# Altium PCB SY_HR08_MCU_PCB_V1.1.PcbDoc (part 1 of 3)
Units mm, origin at the board's own origin, x right, y up, seen from the top; angles counter-clockwise.
Board outline 140 x 80 mm, 2 copper layers (Top Layer, Bottom Layer); 373 components, 215 nets, 1143 pads, 670 vias.
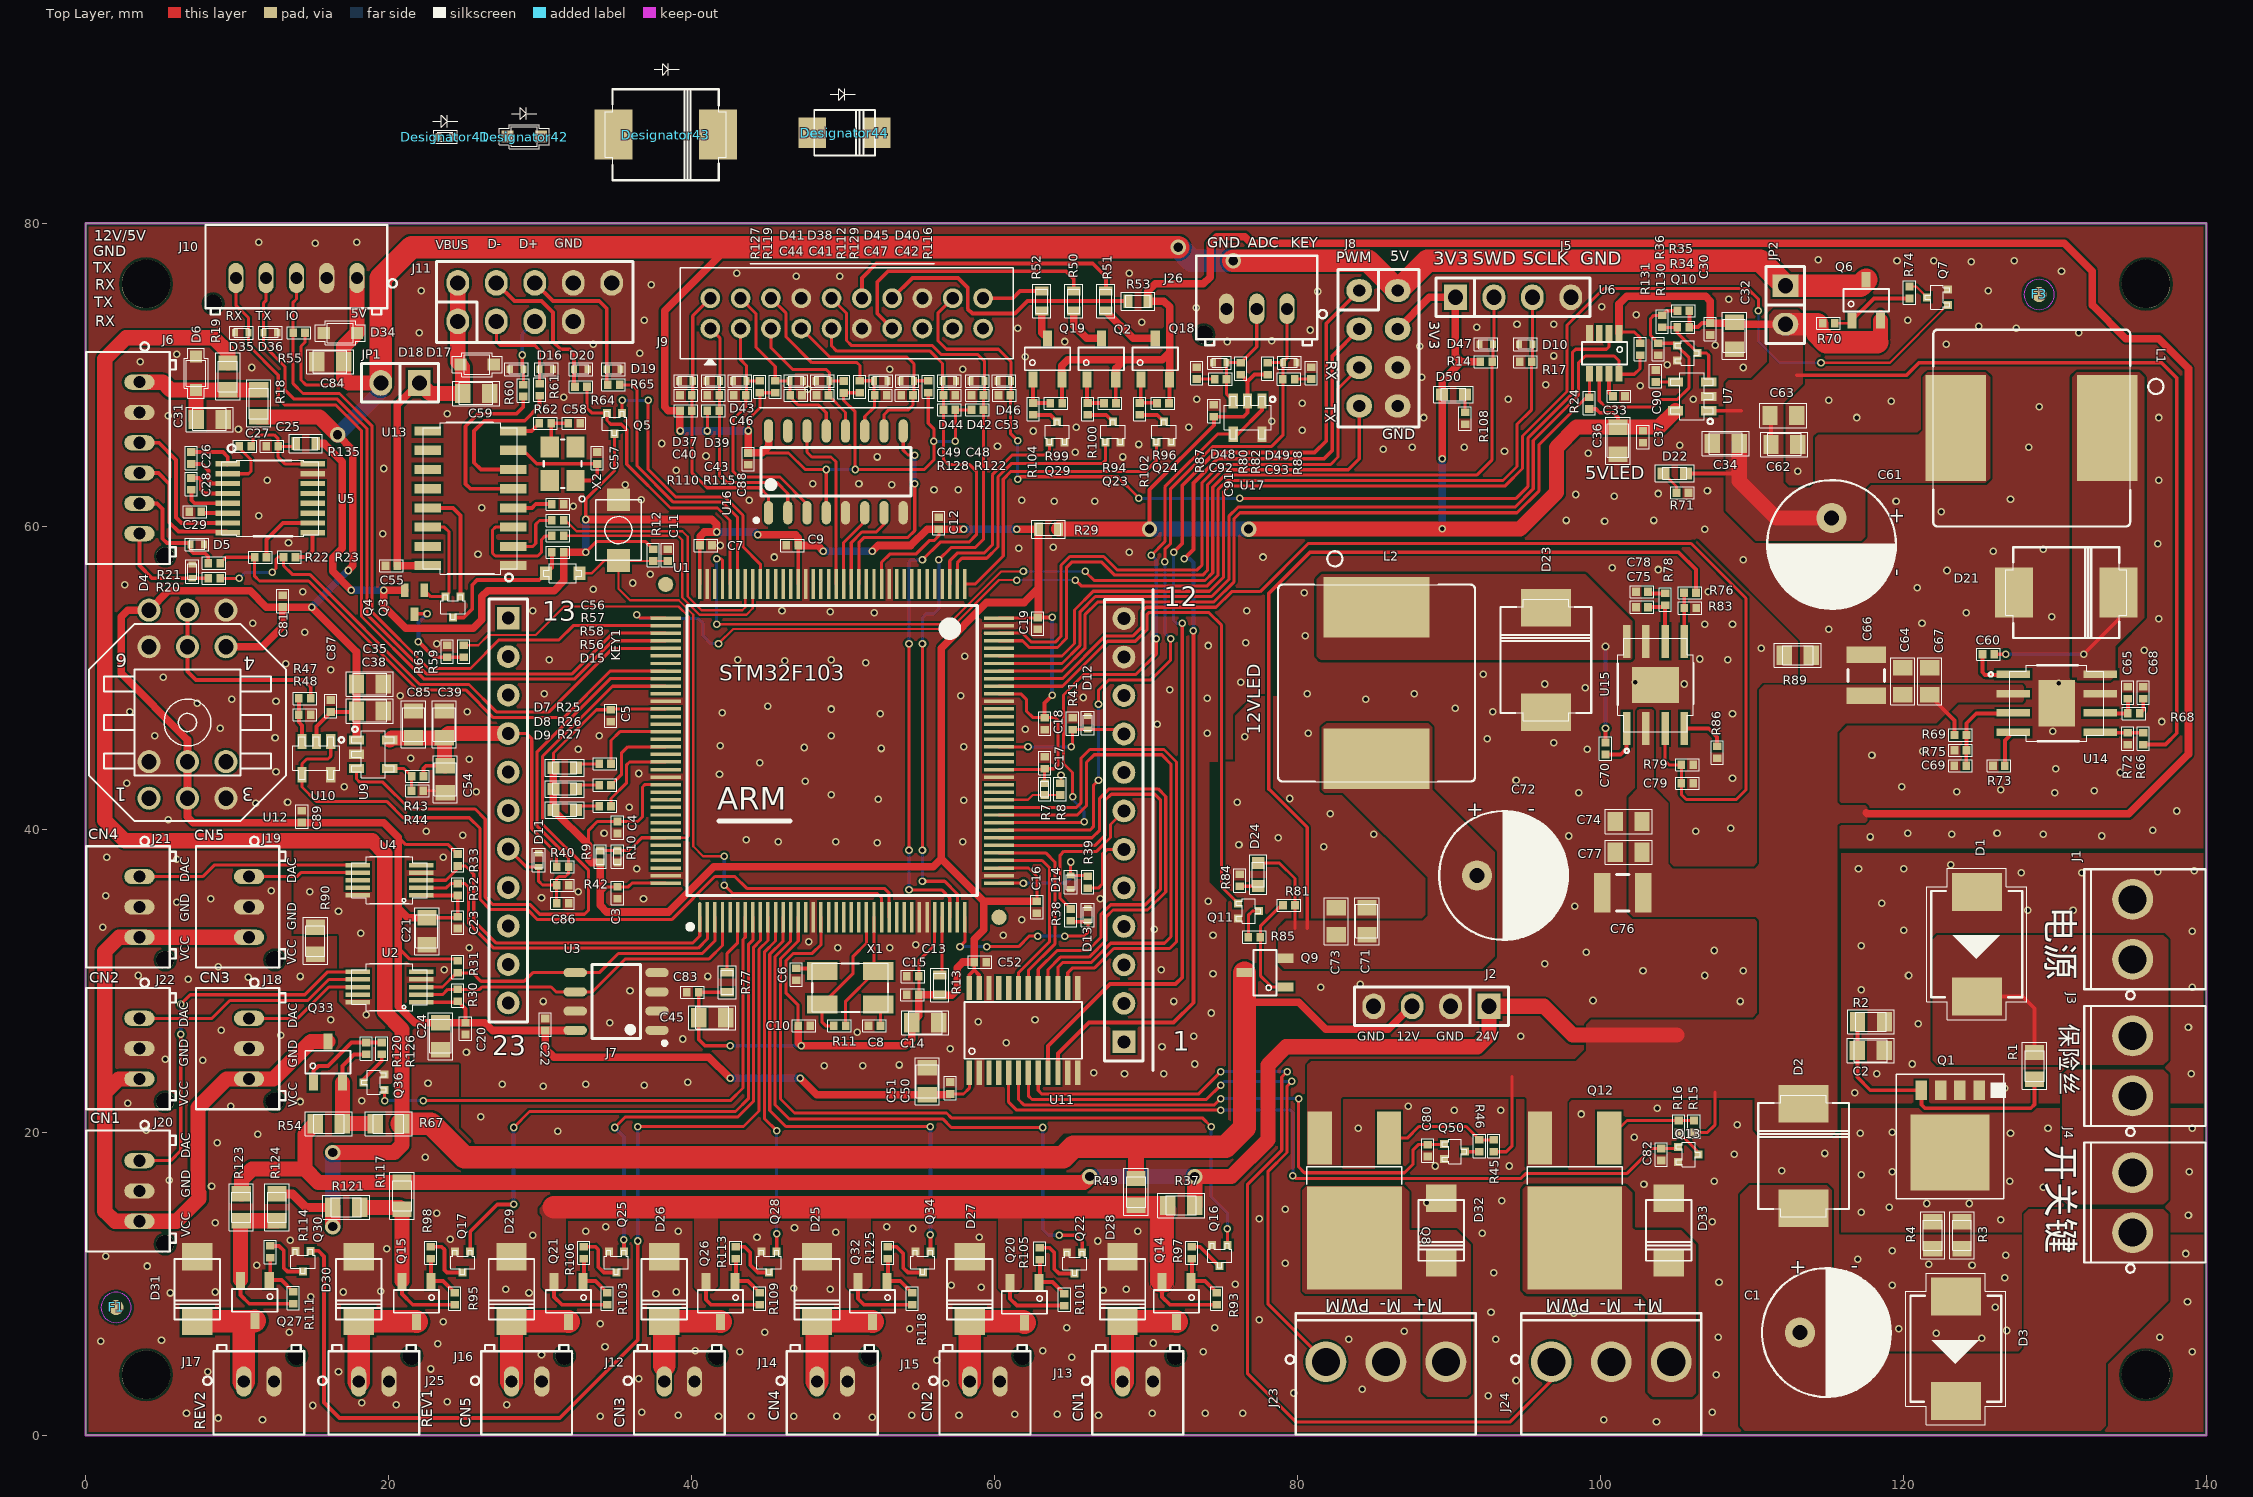
[diagram p0: Top Layer view]
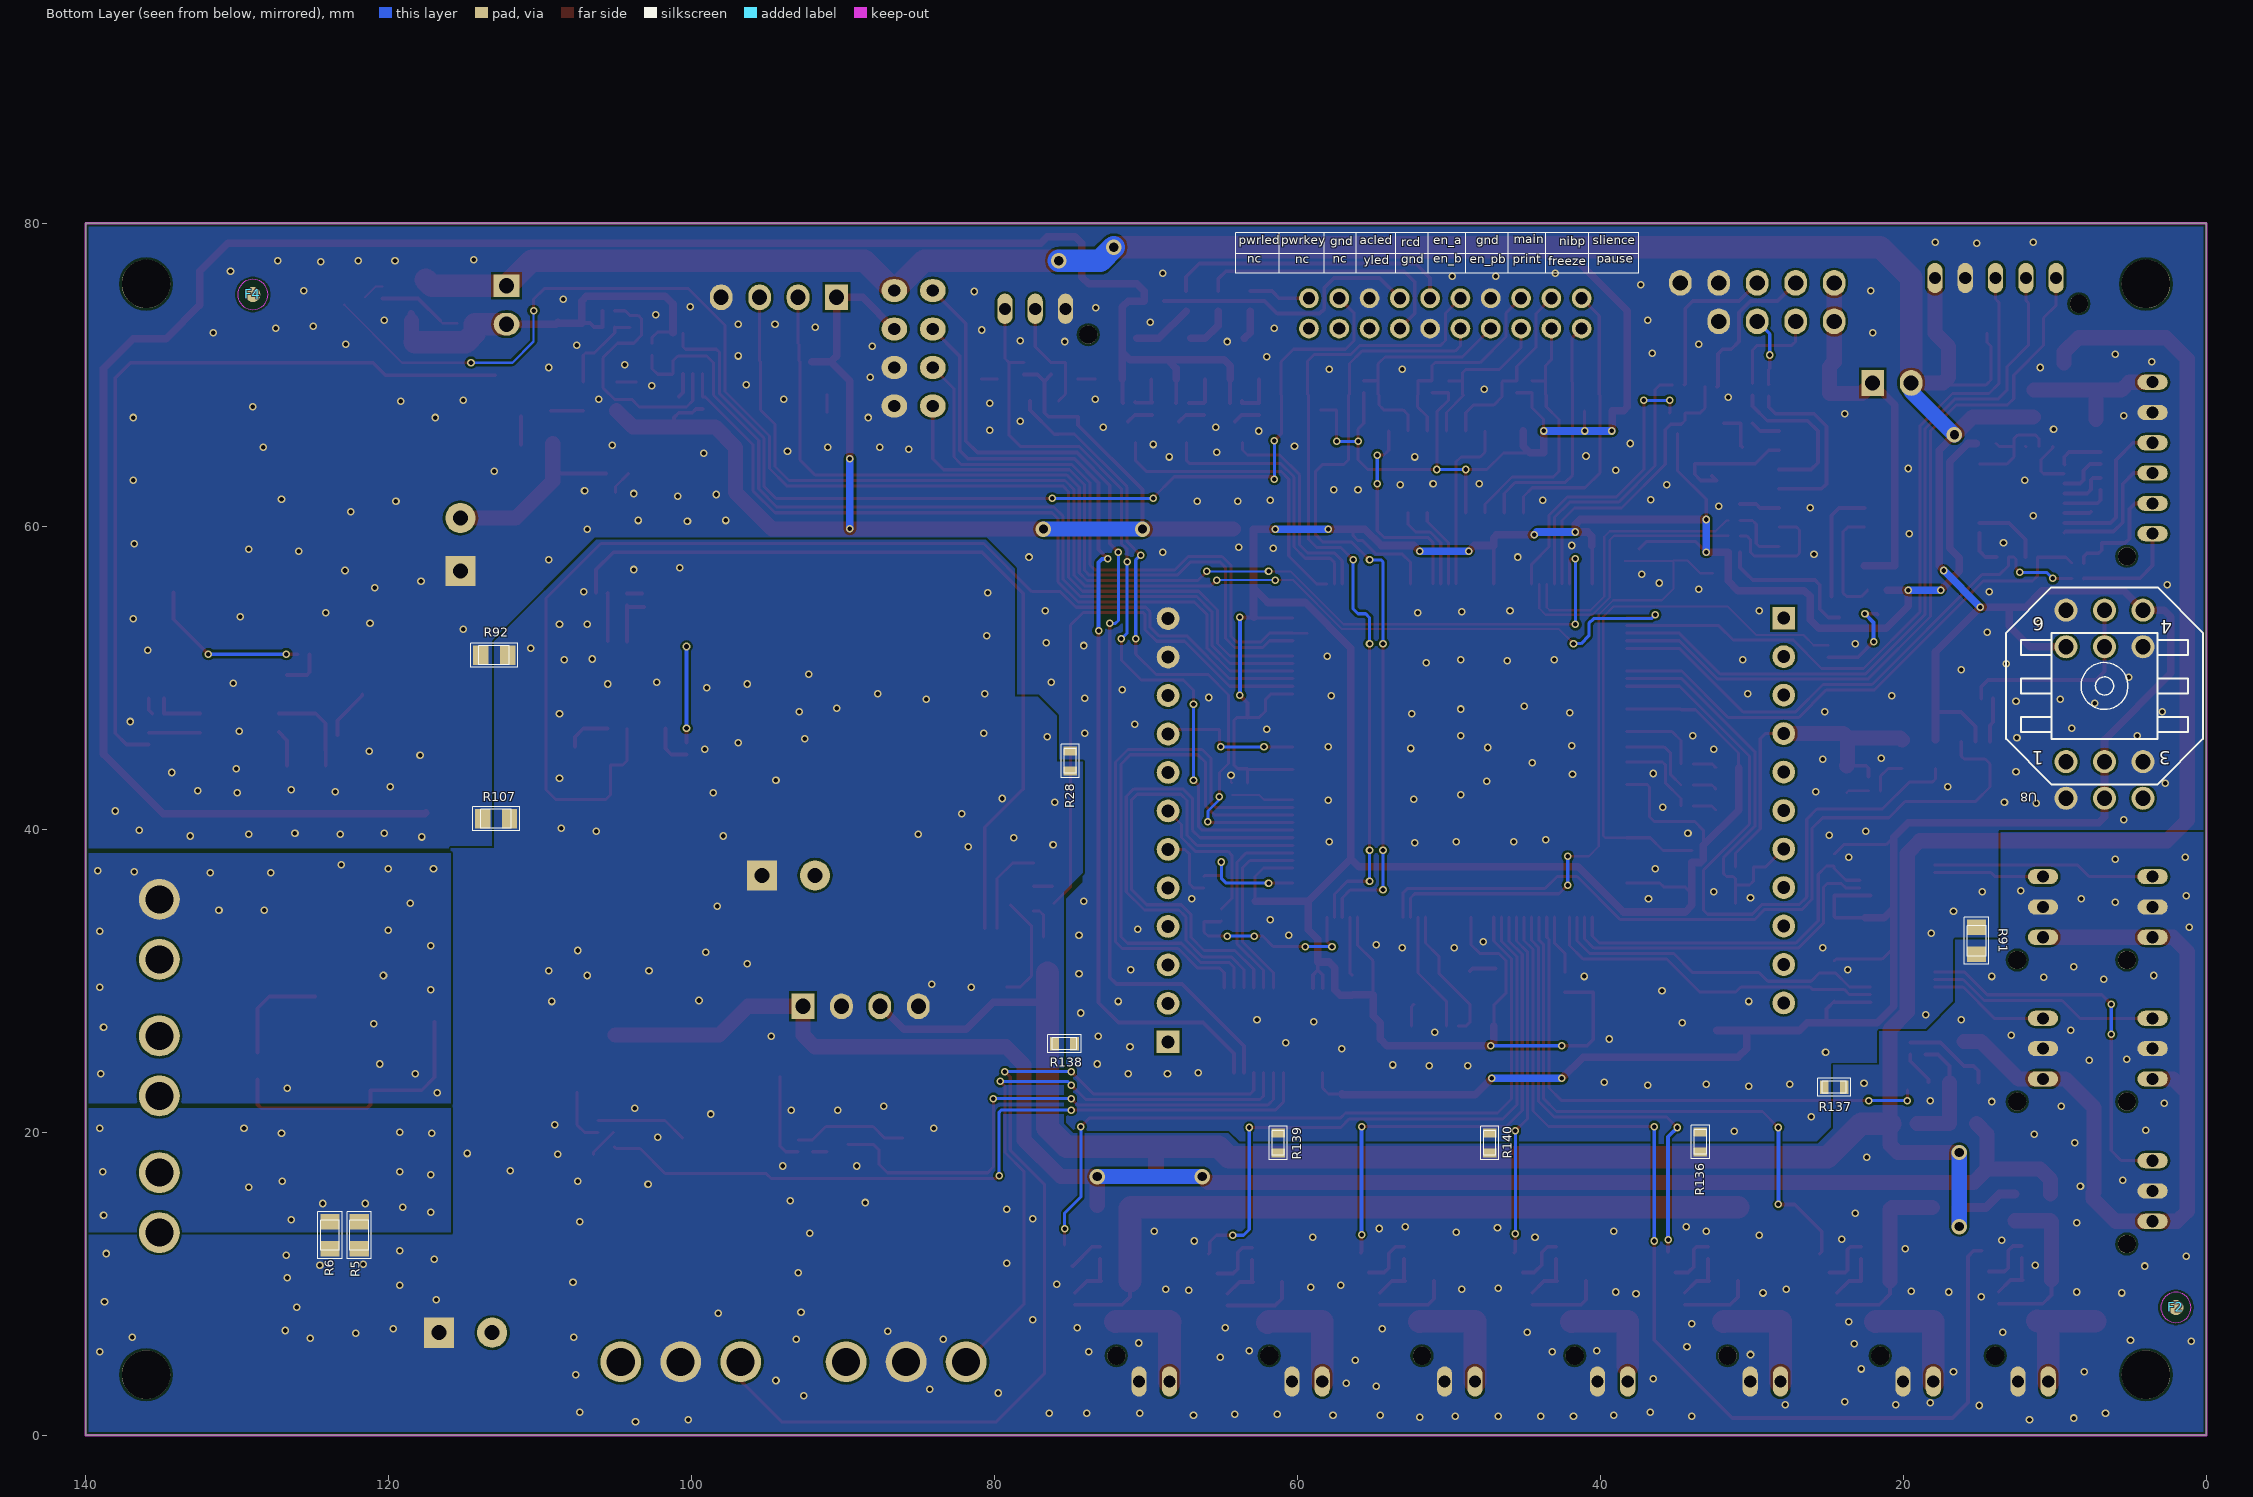
[diagram p1: Bottom Layer view, seen from below]

## Layer stack, top to bottom
Top Solder: solder mask 0.0102, Solder Resist, Dk 3.5
Top Layer: signal copper 0.0356
Dielectric 1: dielectric 0.32, FR-4, Dk 4.8
Bottom Layer: signal copper 0.0356
Bottom Solder: solder mask 0.0102, Solder Resist, Dk 3.5

## Board outline
0,0 140,0 140,80 0,80

## Design rules (kind name [scope] priority, off if disabled: settings)
Clearance [All] p1: gap=0.15
ComponentClearance [All] p1: gap=0.1 collisioncheckmode=3 verticalgap=0.1 showdistances=FALSE
DiffPairsRouting [All] p1: maxlimit=3 minlimit=0.15 mostfreqgap=0.15 toplayer_minwidth=0.15 toplayer_maxwidth=3 toplayer_prefwidth=0.15 bottomlayer_minwidth=0.15 bottomlayer_maxwidth=3 bottomlayer_prefwidth=0.15 maxuncoupledlength=12.7
HoleToHoleClearance [All] p1: gap=0.15 allowstackedmicrovias=TRUE
MinimumSolderMaskSliver [All] p1: minsoldermaskwidth=0.15
PlaneConnect [All] p1: planeconnectstyle=Direct reliefexpansion=0.508 reliefentries=4 reliefconductorwidth=0.254 reliefairgap=0.254
PolygonConnect [All] p1: connectstyle=Direct reliefconductorwidth=0.254 reliefentries=4 polygonreliefangle="90 Angle" airgapwidth=0.254
RoutingVias [All] p1: holewidth=0.711 width=1.27 viastyle="Through Hole" minholewidth=0.711 minwidth=1.27 maxholewidth=0.711 maxwidth=1.27
SilkToSilkClearance [All] p1: silktosilkclearance=0.15
SolderMaskExpansion [All] p1: expansion=0.102
Width [All] p1: maxlimit=3 minlimit=0.15 preferedwidth=0.15 minimp=50.000000 maximp=50.000000 favimp=50.000000
24 further rules are at their usual default settings.

## Classes and differential pairs
component class Designator: D25 D26 D27 D28 D29 D30 D31 J2 J12 J13 J14 J15 J16 J17 J18 J19 J20 J21 J22 J25 Q14 Q15 Q16 Q17 Q20 Q21 Q22 Q25 Q26 Q27 Q28 Q30 Q32 Q33 Q34 Q36 R37 R49 R54 R67 R93 R95 R97 R98 R101 R103 R105 R106 R109 R111 R113 R114 R117 R118 R120 R121 R123 R124 R125 R126
component class SY_HR08_MCU_TOP_V1.1: C1 C2 D1 D2 D3 F1 F2 F3 F4 J1 J3 J4 Q1 R1 R2 R3 R4 R5 R6
component class Designator: C55 C56 C57 C58 C59 D15 D16 D17 D18 D19 D20 J11 JP1 JP2 Q3 Q4 Q5 R56 R57 R58 R59 R60 R61 R62 R63 R64 R65 U13 X2

## Components (designator, comment, footprint, x,y, rotation, side; value= is the part's Value field where it differs from the comment)
C1 "UHD1H101MPD" UHD1H101MPD 114.912,6.782 r0 top
C2 "C0805_10UF_50V" CAP0805-B 117.843,25.4 r180 top
C3 "C0402_100NF_16V_K" CAP0402_HQ 35.115,35.814 r270 top
C4 "C0402_100NF_16V_K" CAP0402_HQ 35.115,40.119 r270 top
C5 "C0402_100NF_16V_K" CAP0402_HQ 34.677,47.498 r270 top
C6 "C0402-22PF" CAP0402_HQ 46.926,30.429 r270 top
C7 "C0402_100NF_16V_K" CAP0402_HQ 40.957,58.737 r0 top
C8 "C0402-22PF" CAP0402_HQ 52.083,27.03 r180 top
C9 "C0402_100NF_16V_K" CAP0402_HQ 46.652,58.737 r180 top
C10 "C0402_100NF_16V_K" CAP0402_HQ 47.434,27.03 r0 top
C11 "C0402_100NF_16V_K" CAP0402_HQ 38.417,58.102 r90 top
C12 "C0402_100NF_16V_K" CAP0402_HQ 56.325,60.211 r90 top
C13 "C0402_100NF_16V_K" CAP0402_HQ 54.61,30.29 r180 top
C14 "C0805_10UF_10V" CAP0805-B 55.435,27.241 r180 top
C15 "C0402_100NF_16V_K" CAP0402_HQ 54.597,29.083 r180 top
C16 "C0402_100NF_16V_K" CAP0402_HQ 62.801,34.861 r270 top
C17 "C0402_100NF_16V_K" CAP0402_HQ 63.309,44.395 r90 top
C18 "C0402_100NF_16V_K" CAP0402_HQ 63.309,46.977 r270 top
C19 "C0402_100NF_16V_K" CAP0402_HQ 62.865,53.594 r270 top
C20 "C0402_100NF_16V_K" CAP0402_HQ 25.082,26.848 r270 top
C21 "C0805_10UF_10V" CAP0805-B 22.538,33.274 r90 top
C22 "C0402_100NF_16V_K" CAP0402_HQ 30.353,27.114 r270 top
C23 "C0402_100NF_16V_K" CAP0402_HQ 24.575,33.846 r270 top
C24 "C0805_10UF_10V" CAP0805-B 23.431,26.352 r90 top
C25 "C0402_100NF_16V_K" CAP0402_HQ 12.319,65.278 r180 top
C26 "C0402_100NF_16V_K" CAP0402_HQ 6.985,64.516 r90 top
C27 "C0402_100NF_16V_K" CAP0402_HQ 10.541,65.278 r180 top
C28 "C0402_100NF_16V_K" CAP0402_HQ 6.985,62.801 r90 top
C29 "C0402_100NF_16V_K" CAP0402_HQ 7.239,60.96 r0 top
C30 "C0402_100NF_16V_K" CAP0402_HQ 107.251,73.025 r270 top
C31 "C0805_10UF_50V" CAP0805-B 8.191,67.056 r180 top
C32 "C0805_10UF_10V" CAP0805-B 108.839,72.581 r90 top
C33 "C0402_1uF_16V_K" CAP0402_HQ 101.219,68.58 r0 top
C34 "C0805_10UF_10V" CAP0805-B 108.267,65.468 r0 top
C35 "C0805_10UF_10V" CAP0805-B 18.775,49.593 r180 top
C36 "C0805_10UF_10V" CAP0805-B 101.155,65.659 r90 top
C37 "C0402_100NF_16V_K" CAP0402_HQ 102.806,65.913 r90 top
C38 "NC_C0805_10UF_10V" CAP0805-B 18.775,47.816 r180 top
C39 "C0805_10UF_10V" CAP0805-B 23.685,46.926 r90 top
C40 "C0402_1NF_16V_K" CAP0402_HQ 39.631,68.644 r0 top
C41 "C0402_1NF_16V_K" CAP0402_HQ 48.645,68.644 r0 top
C42 "C0402_1NF_16V_K" CAP0402_HQ 54.231,68.644 r0 top
C43 "C0402_1NF_16V_K" CAP0402_HQ 41.442,68.644 r0 top
C44 "C0402_1NF_16V_K" CAP0402_HQ 46.904,68.644 r180 top
C45 "C0805_10UF_10V" CAP0805-B 41.364,27.559 r180 top
C46 "C0402_1NF_16V_K" CAP0402_HQ 43.186,68.644 r0 top
C47 "C0402_1NF_16V_K" CAP0402_HQ 52.486,68.644 r180 top
C48 "C0402_47pF_16V_K" CAP0402_HQ 58.877,68.644 r0 top
C49 "C0402_47pF_16V_K" CAP0402_HQ 57.023,68.644 r180 top
C50 "C0402_100NF_16V_K" CAP0402_HQ 57.087,22.93 r270 top
C51 "C0805_10UF_10V" CAP0805-B 55.562,23.368 r90 top
C52 "C0402_100NF_16V_K" CAP0402_HQ 59.055,31.242 r180 top
C53 "C0402_1NF_16V_K" CAP0402_HQ 60.655,68.644 r0 top
C54 "NC_C0805_10UF_10V" CAP0805-B 23.749,43.307 r90 top
C55 "C0402_100NF_16V_K" CAP0402_HQ 20.193,57.404 r180 top
C56 "C0402_100NF_16V_K" CAP0402_HQ 31.178,61.468 r180 top
C57 "C0402-22PF" CAP0402_HQ 33.782,64.516 r270 top
C58 "C0402-22PF" CAP0402_HQ 32.258,66.802 r180 top
C59 "C0805_10UF_10V" CAP0805-B 25.781,68.77 r180 top
C60 "C0402_100NF_16V_K" CAP0402_HQ 125.603,51.562 r180 top
C61 "UHD1H101MPD" UHD1H101MPD 115.252,58.801 r270 top
C62 "C0805_10UF_10V" CAP0805-B 112.141,65.405 r180 top
C63 "C0805_4.7UF" CAP0805 112.078,67.31 r180 top
C64 "C0805_4.7UF" CAP0805 119.951,49.784 r270 top
C65 "C0402_47PF_50V" CAP0402_HQ 134.81,49.022 r270 top
C66 "C1210_4.7UF" C1210 117.538,50.165 r270 top
C67 "C0805_4.7UF" CAP0805 121.73,49.784 r270 top
C68 "C0402_47NF_10V" CAP0402_HQ 135.826,49.022 r270 top
C69 "C0402_1uF_16V_K" CAP0402_HQ 123.749,44.196 r0 top
C70 "C0402_100NF_16V_K" CAP0402_HQ 100.33,45.339 r270 top
C71 "C0805_10UF_50V" CAP0805-B 84.582,33.941 r270 top
C72 "UHD1H101MPD" UHD1H101MPD 93.599,36.957 r0 top
C73 "C0805_4.7UF" CAP0805 82.55,33.941 r270 top
C74 "C0805_4.7UF" CAP0805 101.854,40.513 r0 top
C75 "C0402_10PF_50V" CAP0402_HQ 102.743,54.673 r0 top
C76 "C1210_4.7UF" C1210 101.473,35.814 r0 top
C77 "C0805_4.7UF" CAP0805 101.854,38.481 r0 top
C78 "C0402_15NF_10V" CAP0402_HQ 102.743,55.689 r0 top
C79 "C0402_1UF_16V_K" CAP0402_HQ 105.727,43.053 r180 top
C80 "NC_C0402_1NF_16V_K" CAP0402_HQ 88.591,18.796 r270 top
C81 "C0402_1NF_16V_K" CAP0402_HQ 13.018,55.067 r90 top
C82 "NC_C0402_1NF_16V_K" CAP0402_HQ 104.013,18.542 r270 top
C83 "C0402_100NF_16V_K" CAP0402_HQ 40.081,29.248 r180 top
C84 "C0805_10UF_10V" CAP0805-B 16.144,70.866 r180 top
C85 "C0805_10UF_10V" CAP0805-B 21.653,46.926 r270 top
C86 "C0402_100NF_16V_K" CAP0402_HQ 31.496,35.115 r0 top
C87 "C0402_100NF_16V_K" CAP0402_HQ 16.192,48.143 r270 top
C88 "C0402_100NF_16V_K" CAP0402_HQ 43.749,64.453 r90 top
C89 "C0402_100NF_16V_K" CAP0402_HQ 14.287,40.843 r90 top
C90 "C0402_100NF_16V_K" CAP0402_HQ 103.632,69.924 r270 top
C91 "C0402_100NF_16V_K" CAP0402_HQ 74.486,67.627 r90 top
C92 "C0402_100NF_16V_K" CAP0402_HQ 74.923,69.723 r0 top
C93 "C0402_100NF_16V_K" CAP0402_HQ 79.426,69.723 r180 top
D1 "SMDJ" SMDJ 124.841,32.423 r270 top
D2 "B560C-13-F" B540C-13-F 113.408,18.44 r270 top
D3 "SMDJ" SMDJ 123.457,5.715 r270 top
D4 "ESD9X5.0ST5G" ESD9X5.0ST5G 7.048,57.023 r90 top
D5 "ESD9X5.0ST5G" ESD9X5.0ST5G 7.366,58.801 r0 top
D6 "ESD5621W15-2/TR" ESD5621W15-SOD323F 7.302,70.104 r90 top
D7 "BL-HZ336G-L8-TRB" LED_1.6_0.8_0.4 31.635,44.069 r180 top
D8 "BL-HZ336G-L8-TRB" LED_1.6_0.8_0.4 31.635,42.672 r180 top
D9 "BL-HZ336G-L8-TRB" LED_1.6_0.8_0.4 31.635,41.275 r180 top
D10 "ESD9X5.0ST5G" ESD9X5.0ST5G 95.059,72.009 r180 top
D11 "NC_ESD9X5.0ST5G" ESD9X5.0ST5G 29.909,37.973 r90 top
D12 "NC_ESD9X5.0ST5G" ESD9X5.0ST5G 66.167,47.033 r90 top
D13 "NC_ESD9X5.0ST5G" ESD9X5.0ST5G 66.167,34.353 r90 top
D14 "NC_ESD9X5.0ST5G" ESD9X5.0ST5G 65.024,36.512 r270 top
D15 "WSB5819W-2/TR//B5819WS" WSB5819W-2$2F$TR 31.496,56.896 r0 top
D16 "ESD9X5.0ST5G" ESD9X5.0ST5G 30.416,70.358 r0 top
D17 "ESD9X5.0ST5G" ESD9X5.0ST5G 28.453,70.358 r180 top
D18 "ESD5601W-2/TR" ESD5601W-2$2F$TR 25.845,70.675 r0 top
D19 "ESD9X5.0ST5G" ESD9X5.0ST5G 34.856,70.358 r0 top
D20 "ESD9X5.0ST5G" ESD9X5.0ST5G 32.703,70.358 r0 top
D21 "B560C-13-F" B540C-13-F 130.746,55.626 r180 top
D22 "BL-HZ336G-L8-TRB" LED_1.6_0.8_0.4 104.902,63.5 r0 top
D23 "B560C-13-F" B540C-13-F 96.393,51.181 r270 top
D24 "BL-HZ336G-L8-TRB" LED_1.6_0.8_0.4 77.406,37.02 r90 top
D25 "1N4007" 1N4007 48.285,9.652 r90 top
D26 "1N4007" 1N4007 38.202,9.652 r90 top
D27 "1N4007" 1N4007 58.369,9.652 r90 top
D28 "1N4007" 1N4007 68.453,9.652 r90 top
D29 "1N4007" 1N4007 28.118,9.652 r90 top
D30 "1N4007" 1N4007 18.034,9.652 r90 top
D31 "1N4007" 1N4007 7.366,9.652 r90 top
D32 "1N4007" 1N4007 89.484,13.525 r90 top
D33 "1N4007" 1N4007 104.508,13.525 r90 top
D34 "ESD5601W-2/TR" ESD5601W-2$2F$TR 16.822,72.771 r180 top
D35 "ESD9X5.0ST5G" ESD9X5.0ST5G 10.303,72.771 r180 top
D36 "ESD9X5.0ST5G" ESD9X5.0ST5G 12.208,72.771 r0 top
D37 "ESD9X5.0ST5G" ESD9X5.0ST5G 39.631,69.596 r180 top
D38 "ESD9X5.0ST5G" ESD9X5.0ST5G 48.651,69.596 r180 top
D39 "ESD9X5.0ST5G" ESD9X5.0ST5G 41.442,69.596 r180 top
D40 "ESD9X5.0ST5G" ESD9X5.0ST5G 54.241,69.596 r180 top
D41 "ESD9X5.0ST5G" ESD9X5.0ST5G 46.904,69.596 r0 top
D42 "ESD9X5.0ST5G" ESD9X5.0ST5G 58.877,69.596 r180 top
D43 "ESD9X5.0ST5G" ESD9X5.0ST5G 43.186,69.596 r180 top
D44 "ESD9X5.0ST5G" ESD9X5.0ST5G 57.023,69.596 r0 top
D45 "ESD9X5.0ST5G" ESD9X5.0ST5G 52.494,69.596 r0 top
D46 "ESD9X5.0ST5G" ESD9X5.0ST5G 60.642,69.596 r180 top
D47 "ESD9X5.0ST5G" ESD9X5.0ST5G 92.451,72.009 r180 top
D48 "ESD9X5.0ST5G" ESD9X5.0ST5G 74.867,70.802 r180 top
D49 "ESD9X5.0ST5G" ESD9X5.0ST5G 79.482,70.802 r0 top
D50 "BL-HZ336G-L8-TRB" LED_1.6_0.8_0.4 90.297,68.707 r180 top
Designator41 "Comment" ESD9X5.0ST5G 23.749,85.725 r180 top
Designator42 "Comment" ESD5601W-2$2F$TR 28.956,85.725 r180 top
Designator43 "Comment" B540C-13-F 38.291,85.852 r180 top
Designator44 "Comment" 1N4007 50.102,85.979 r180 top
F1 "FIDUCIAL_MARKER" FIDUCIAL_WITHPASTE 2.017,8.443 r0 top
F2 "FIDUCIAL_MARKER" FIDUCIAL_WITHPASTE 2.017,8.443 r180 bottom
F3 "FIDUCIAL_MARKER" FIDUCIAL_WITHPASTE 128.953,75.305 r0 top
F4 "FIDUCIAL_MARKER" FIDUCIAL_WITHPASTE 128.953,75.305 r180 bottom
J1 "HX39601-2A" HX39601-2A 135.128,33.401 r90 top
J2 "SIM900A" CON1X4(2.54mm) 92.647,28.321 r180 top
J3 "HX39601-2A" HX39601-2A 135.128,24.384 r90 top
J4 "HX39601-2A" HX39601-2A 135.128,15.367 r90 top
J5 "SIM900A" CON1X4(2.54mm) 90.424,75.12 r0 top
J6 "HX20018-6A" HX20018-6A 3.556,64.516 r270 top
J7 "USR-NB75" USR-LTE-7S4 27.905,28.54 r0 top locked
J8 "Header 4X2" CON2X4(2.54MM) 84.074,75.565 r0 top
J9 "PHD2.0-2*10P" PHD2.0-20P 41.245,73.057 r0 top
J10 "HX20018-5A" HX20018-5A 13.922,76.391 r180 top
J11 "USB-9pin" USB-9PIN 24.575,73.533 r90 top
J12 "HX20018-2A" HX20018-2A 39.202,3.556 r0 top
J13 "HX20018-2A" HX20018-2A 69.453,3.556 r0 top
J14 "HX20018-2A" HX20018-2A 49.285,3.556 r0 top
J15 "HX20018-2A" HX20018-2A 59.369,3.556 r0 top
J16 "HX20018-2A" HX20018-2A 29.118,3.556 r0 top
J17 "HX20018-2A" HX20018-2A 11.446,3.556 r0 top
J18 "HX20018-3A" HX20018-3A 10.795,25.527 r270 top
J19 "HX20018-3A" HX20018-3A 10.795,34.877 r270 top
J20 "HX20018-3A" HX20018-3A 3.556,16.129 r270 top
J21 "HX20018-3A" HX20018-3A 3.556,34.877 r270 top
J22 "HX20018-3A" HX20018-3A 3.556,25.527 r270 top
J23 "HX39601-3A" HX39601-3A 85.829,4.856 r0 top
J24 "HX39601-3A" HX39601-3A 100.711,4.856 r0 top
J25 "HX20018-2A" HX20018-2A 19.034,3.556 r0 top
J26 "HX20018-3A" HX20018-3A 77.311,74.358 r180 top
JP1 "JP2" CON1X2(2.54mm) 22.034,69.469 r180 top
JP2 "JP2" CON1X2(2.54mm) 112.204,75.882 r270 top
KEY1 "KEY_3x4x2" KEY_3x4x2 35.179,59.753 r180 top
L1 "SRR1208-220ML" SRR1208 128.46,66.484 r180 top
L2 "SRR1208-150ML" SRR1208 85.217,49.657 r270 top
Q1 "CSD18533Q5A" CSD18533Q5A 122.956,19.478 r180 top
Q2 "AO3401-PMOS" AO3400 67.056,71.056 r0 top
Q3 "DTC043ZEBTL" DTC043ZEBTL$2F$$2F$DTC143ZE$2F$$2F$LDTC143ZET1G 24.257,54.673 r90 top
Q4 "DTA143ZUBTL" UMT3F 21.717,54.991 r90 top
Q5 "DTC043ZEBTL" DTC043ZEBTL$2F$$2F$DTC143ZE$2F$$2F$LDTC143ZET1G 34.925,66.802 r90 top
Q6 "AO3401-PMOS" AO3400 117.538,74.93 r0 top
Q7 "DTC043ZEBTL" DTC043ZEBTL$2F$$2F$DTC143ZE$2F$$2F$LDTC143ZET1G 122.237,75.12 r0 top
Q8 "PMOS  TO252" TO-252 86.042,19.617 r180 top
Q9 "AO3401-PMOS" AO3400 77.851,30.543 r90 top
Q10 "NC_DTC043ZEBTL" DTC043ZEBTL$2F$$2F$DTC143ZE$2F$$2F$LDTC143ZET1G 105.727,71.438 r180 top
Q11 "DTC043ZEBTL" DTC043ZEBTL$2F$$2F$DTC143ZE$2F$$2F$LDTC143ZET1G 76.763,34.616 r180 top
Q12 "PMOS  TO252" TO-252 100.584,19.617 r180 top
Q13 "DTC043ZEBTL" DTC043ZEBTL$2F$$2F$DTC143ZE$2F$$2F$LDTC143ZET1G 105.791,18.542 r180 top
Q14 "AO3401-PMOS" AO3400 72.009,8.843 r180 top
Q15 "AO3401-PMOS" AO3400 21.844,8.843 r180 top
Q16 "DTC043ZEBTL" DTC043ZEBTL$2F$$2F$DTC143ZE$2F$$2F$LDTC143ZET1G 74.867,11.874 r90 top
Q17 "DTC043ZEBTL" DTC043ZEBTL$2F$$2F$DTC143ZE$2F$$2F$LDTC143ZET1G 24.892,11.43 r90 top
Q18 "AO3401-PMOS" AO3400 70.612,71.056 r0 top
Q19 "AO3401-PMOS" AO3400 63.5,71.056 r0 top
Q20 "AO3401-PMOS" AO3400 61.976,8.779 r180 top
Q21 "AO3401-PMOS" AO3400 31.877,8.843 r180 top
Q22 "DTC043ZEBTL" DTC043ZEBTL$2F$$2F$DTC143ZE$2F$$2F$LDTC143ZET1G 65.291,11.367 r90 top
Q23 "DTC043ZEBTL" DTC043ZEBTL$2F$$2F$DTC143ZE$2F$$2F$LDTC143ZET1G 67.818,66.23 r270 top
Q24 "DTC043ZEBTL" DTC043ZEBTL$2F$$2F$DTC143ZE$2F$$2F$LDTC143ZET1G 71.183,66.23 r270 top
Q25 "DTC043ZEBTL" DTC043ZEBTL$2F$$2F$DTC143ZE$2F$$2F$LDTC143ZET1G 35.039,11.43 r90 top
Q26 "AO3401-PMOS" AO3400 41.91,8.843 r180 top
Q27 "AO3401-PMOS" AO3400 11.176,8.906 r180 top
Q28 "DTC043ZEBTL" DTC043ZEBTL$2F$$2F$DTC143ZE$2F$$2F$LDTC143ZET1G 45.123,11.43 r90 top
Q29 "DTC043ZEBTL" DTC043ZEBTL$2F$$2F$DTC143ZE$2F$$2F$LDTC143ZET1G 64.135,66.23 r270 top
Q30 "DTC043ZEBTL" DTC043ZEBTL$2F$$2F$DTC143ZE$2F$$2F$LDTC143ZET1G 14.351,11.493 r90 top
Q32 "AO3401-PMOS" AO3400 51.943,8.843 r180 top
Q33 "AO3401-PMOS" AO3400 16.002,24.638 r0 top
Q34 "DTC043ZEBTL" DTC043ZEBTL$2F$$2F$DTC143ZE$2F$$2F$LDTC143ZET1G 55.27,11.43 r90 top
Q36 "DTC043ZEBTL" DTC043ZEBTL$2F$$2F$DTC143ZE$2F$$2F$LDTC143ZET1G 19.05,23.304 r0 top
Q50 "DTC043ZEBTL" DTC043ZEBTL$2F$$2F$DTC143ZE$2F$$2F$LDTC143ZET1G 90.369,18.732 r180 top
R1 "R0805_100K_J" RES0805 128.651,24.384 r90 top
R2 "R0805_100K_J" RES0805 117.856,27.305 r180 top
R3 "R0805_0R" RES0805 123.863,13.208 r270 top
R4 "R0805_0R" RES0805 121.933,13.208 r270 top
R5 "R0805_0R" RES0805 121.933,13.208 r270 bottom
R6 "R0805_0R" RES0805 123.863,13.208 r270 bottom
R7 "R0402_NC" RES0402_HQ_NC 63.309,42.659 r270 top
R8 "R0402_10K_J" RES0402_HQ 64.325,42.659 r90 top
R9 "R0402_NC" RES0402_HQ_NC 33.972,38.207 r90 top
R10 "R0402_10K_J" RES0402_HQ_NC 35.115,38.207 r270 top
R11 "R0402-1M" RES0402_HQ 49.784,27.03 r180 top
R12 "R0402_10K_J" RES0402_HQ 37.465,58.102 r270 top
R13 "R0603_0R_J" RES0603-A 56.388,29.718 r90 top
R14 "R0402_10K_J" RES0402_HQ 92.456,70.866 r180 top
R15 "R0402_100K_J" RES0402_HQ 106.172,20.383 r270 top
R16 "R0402_100K_J" RES0402_HQ 105.156,20.383 r90 top
R17 "R0402_10K_J" RES0402_HQ 95.059,70.866 r0 top
R18 "NC_R0805_0R" RES0805 11.43,68.115 r270 top
R19 "R0805_0R" RES0805 9.398,69.893 r90 top
R20 "R0402_0R_J" RES0402_HQ 8.496,56.563 r0 top
R21 "R0402_0R_J" RES0402_HQ 8.496,57.579 r0 top
R22 "NC_R0402_0R_J" RES0402_HQ 11.557,57.96 r180 top
R23 "NC_R0402_0R_J" RES0402_HQ 13.462,57.975 r180 top
R24 "R0402_100K_J" RES0402_HQ 99.269,68.135 r270 top
R25 "R0402_4.7K_J" RES0402_HQ-A 34.296,44.323 r180 top
R26 "R0402_4.7K_J" RES0402_HQ-A 34.296,42.926 r180 top
R27 "R0402_4.7K_J" RES0402_HQ-A 34.296,41.529 r180 top
R28 "NC_R0603_0R_J" RES0603-A 74.993,44.514 r90 bottom
R29 "R0603_0R_J" RES0603-A 63.563,59.817 r180 top
R30 "R0402_5.1K_J" RES0402_HQ 24.575,29.048 r270 top
R31 "R0402_5.1K_J" RES0402_HQ 24.575,30.924 r90 top
R32 "R0402_5.1K_J" RES0402_HQ 24.575,36.033 r270 top
R33 "R0402_5.1K_J" RES0402_HQ 24.575,37.973 r90 top
R34 "NC_R0402_100K_J" RES0402_HQ 105.461,73.152 r0 top
R35 "NC_R0402_100K_J" RES0402_HQ 105.474,74.231 r0 top
R36 "R0402_0_J" RES0402_HQ 104.076,73.533 r270 top
R37 "R0805_0R" RES0805 72.326,15.176 r180 top
R38 "R0402_0R_J" RES0402_HQ 65.024,34.353 r270 top
R39 "R0402_0R_J" RES0402_HQ 66.167,36.512 r270 top
R40 "R0402_27K_J" RES0402_HQ 31.496,37.529 r0 top
R41 "R0402_100K_J" RES0402_HQ 65.151,46.977 r270 top
R42 "R0402_100K_J" RES0402_HQ 31.496,36.322 r0 top
R43 "R0402_100K_F" RES0402_HQ 21.92,43.497 r0 top
R44 "R0402_47K_F" RES0402_HQ 21.907,42.545 r180 top
R45 "R0402_100K_J" RES0402_HQ 92.964,19.113 r270 top
R46 "R0402_100K_J" RES0402_HQ 92.011,19.113 r90 top
R47 "R0402_100K_J" RES0402_HQ 14.478,48.641 r0 top
R48 "R0402_100K_J" RES0402_HQ 14.478,47.561 r0 top
R49 "NC_R0805_0R" RES0805 69.342,16.066 r270 top
R50 "R0603_0R_J" RES0603-A 65.236,74.867 r90 top
R51 "R0603_0R_J" RES0603-A 67.352,74.867 r90 top
R52 "R0603_0R_J" RES0603-A 63.119,74.867 r90 top
R53 "R0603_0R_J" RES0603-A 69.469,74.867 r0 top
R54 "NC_R0805_0R" RES0805 16.066,20.574 r0 top
R55 "R0402_100K_J" RES0402_HQ 14.097,72.771 r0 top
R56 "R0402_10K_J" RES0402_HQ 31.178,58.293 r180 top
R57 "R0402_0R_J" RES0402_HQ 31.178,60.389 r180 top
R58 "R0402_0R_J" RES0402_HQ 31.178,59.372 r180 top
R59 "R0402_10K_J" RES0402_HQ 24.956,51.752 r270 top
R60 "R0402_0R_J" RES0402_HQ 28.892,68.961 r270 top
R61 "R0402_0R_J" RES0402_HQ 29.972,69.025 r270 top
R62 "R0402_220R_J" RES0402_HQ 30.353,66.802 r180 top
R63 "R0402_100K_J" RES0402_HQ 23.876,51.752 r270 top
R64 "R0402_22R_J" RES0402_HQ 32.703,69.215 r0 top
R65 "R0402_22R_J" RES0402_HQ 34.861,69.342 r0 top
R66 "R0402_27K_F" RES0402_HQ 135.826,45.986 r270 top
R67 "R0805_0R" RES0805 20.002,20.574 r180 top
R68 "R0402_5.76K_F" RES0402_HQ 135.204,47.65 r180 top
R69 "R0402_100K_J" RES0402_HQ 123.761,46.228 r180 top
R70 "R0402_100K_J" RES0402_HQ 115.062,73.406 r180 top
R71 "R0402_10K_J" RES0402_HQ 105.41,62.23 r180 top
R72 "R0402_5.1K_F" RES0402_HQ 134.81,45.986 r90 top
R73 "R0402_150K_J" RES0402_HQ 126.296,44.196 r0 top
R74 "R0402_1K_J" RES0402_HQ 120.396,75.438 r270 top
R75 "R0402_15K_J" RES0402_HQ 123.761,45.212 r0 top
R76 "R0402_140K_F" RES0402_HQ 105.905,55.626 r0 top
R77 "R0603_0R_J" RES0603-A 42.355,29.909 r90 top
R78 "R0402_15K_F" RES0402_HQ 104.267,55.181 r270 top
R79 "R0402_100K_J" RES0402_HQ 105.727,44.259 r180 top
R80 "R0402_3.3K_F" RES0402_HQ 76.263,70.409 r90 top
R81 "R0402_100K_J" RES0402_HQ 79.438,34.989 r0 top
R82 "R0402_4.7K_J" RES0402_HQ 78.041,70.409 r90 top
R83 "R0402_10K_F" RES0402_HQ 105.918,54.61 r180 top
R84 "R0402_10K_J" RES0402_HQ 76.2,36.639 r270 top
R85 "R0402_100K_J" RES0402_HQ 77.153,32.893 r0 top
R86 "R0402_150K_J" RES0402_HQ 107.696,45.085 r90 top
R87 "R0402_100R_J" RES0402_HQ 73.349,70.117 r270 top
R88 "R0402_100R_J" RES0402_HQ 80.905,70.117 r270 top
R89 "R0805_0R" RES0805 113.03,51.498 r0 top
R90 "NC_R0805_0R" RES0805 15.176,32.639 r90 top
R91 "NC_R0805_0R" RES0805 15.176,32.639 r90 bottom
R92 "R0805_0R" RES0805 113.03,51.498 r0 bottom
R93 "R0402_100K_J" RES0402_HQ 74.676,9.017 r270 top
R94 "R0402_100K_J" RES0402_HQ 67.627,68.135 r0 top
R95 "R0402_100K_J" RES0402_HQ 24.384,9.017 r270 top
R96 "R0402_100K_J" RES0402_HQ 71.12,68.135 r0 top
R97 "R0402_150K_J" RES0402_HQ 73.025,12.052 r270 top
R98 "R0402_150K_J" RES0402_HQ 22.794,12.052 r270 top
R99 "R0402_100K_J" RES0402_HQ 64.072,68.135 r0 top
R100 "R0402_150K_J" RES0402_HQ 66.167,67.754 r90 top
R101 "R0402_100K_J" RES0402_HQ 64.618,8.954 r270 top
R102 "R0402_150K_J" RES0402_HQ 69.596,67.754 r90 top
R103 "R0402_100K_J" RES0402_HQ 34.442,9.017 r270 top
R104 "R0402_150K_J" RES0402_HQ 62.547,67.754 r90 top
R105 "R0402_150K_J" RES0402_HQ 62.992,11.989 r270 top
R106 "R0402_150K_J" RES0402_HQ 32.893,12.052 r270 top
R107 "R0805_0R" RES0805 112.903,40.703 r0 bottom
R108 "R0402_1K_1/16W" RES0402_HQ-A 91.059,67.132 r270 top
R109 "R0402_100K_J" RES0402_HQ 44.501,9.017 r270 top
R110 "R0402_10K_J" RES0402_HQ 39.631,67.627 r180 top
R111 "R0402_100K_J" RES0402_HQ 13.716,9.08 r270 top
R112 "R0402_10K_J" RES0402_HQ 50.038,69.202 r270 top
R113 "R0402_150K_J" RES0402_HQ 42.926,12.052 r270 top
R114 "R0402_150K_J" RES0402_HQ 12.192,12.116 r270 top
R115 "R0402_10K_J" RES0402_HQ 41.442,67.627 r180 top
R116 "R0402_10K_J" RES0402_HQ 55.626,69.215 r270 top
R117 "R0805_0R" RES0805 20.894,15.811 r270 top
R118 "R0402_100K_J" RES0402_HQ 54.559,9.017 r270 top
R119 "R0402_10K_J" RES0402_HQ 45.529,69.215 r270 top
R120 "R0402_100K_J" RES0402_HQ 18.542,25.54 r270 top
R121 "NC_R0805_0R" RES0805 17.209,15.05 r0 top
R122 "R0402_10K_J" RES0402_HQ 58.877,67.691 r180 top
R123 "R0805_0R" RES0805 10.287,15.05 r270 top
R124 "NC_R0805_0R" RES0805 12.639,15.05 r270 top
R125 "R0402_150K_J" RES0402_HQ 52.959,12.052 r270 top
R126 "R0402_150K_J" RES0402_HQ 19.558,25.54 r90 top
R127 "R0402_10K_J" RES0402_HQ 44.514,69.215 r270 top
R128 "R0402_10K_J" RES0402_HQ 57.023,67.691 r0 top
R129 "R0402_10K_J" RES0402_HQ 51.117,69.215 r270 top
R130 "NC_R0402_100K_J" RES0402_HQ 103.822,71.691 r90 top
R131 "R0402_100K_J" RES0402_HQ 102.616,71.691 r90 top
R135 "R0603_0R_J" RES0603-A 14.541,65.468 r180 top
R136 "NC_R0603_0R_J" RES0603-A 33.401,19.367 r90 bottom
R137 "NC_R0603_0R_J" RES0603-A 24.575,22.987 r0 bottom
R138 "NC_R0603_0R_J" RES0603-A 75.374,25.845 r180 bottom
R139 "NC_R0603_0R_J" RES0603-A 61.277,19.304 r90 bottom
R140 "NC_R0603_0R_J" RES0603-A 47.307,19.304 r90 bottom
U1 "STM32F103ZET6_USER" LQFP144_STM32F103 40.546,34.198 r0 top
U2 "MCP4728" "MSOP-10 - 2" 20.066,29.591 r90 top
U3 "AT24C02C" SOIC8_39MM 37.721,26.733 r180 top
U4 "MCP4728" "MSOP-10 - 2" 20.066,36.639 r90 top
U5 "NC_MAX3232CPWR" MAX3232CPWR 12.192,61.849 r270 top
U6 "LTC2954CTS8" LTC2954CTS8 101.219,72.771 r180 top
U7 "SGM2028-33" TPS7B6950 106.045,68.58 r90 top
U8 "XGZP6847" XGZP6847300KPA 6.731,49.466 r90 bottom
U9 "SGM2028-ADJ" TPS7B6950 18.986,44.958 r270 top
U10 "MCP6001R" TOS23 15.24,44.704 r180 top
U11 "SN74LVC4245A" SN74LVC4245APW 61.912,26.733 r0 top
U12 "XGZP6847" XGZP6847300KPA 6.731,47.053 r90 top
U13 "CH340G" CH340G 25.4,61.849 r90 top
U14 "TPS54560" TPS54560 130.112,48.323 r270 top locked
U15 "TPS54560" TPS54560 103.632,49.53 r0 top locked
U16 "SN74LS148DR" SOIC16_39MM 45.085,60.896 r90 top
U17 "MCP6001R" TOS23 76.708,67.183 r180 top
X1 "7B08070001" 7B08070001 50.474,29.548 r180 top
X2 "7V12000001" 7V12000001 31.496,64.135 r90 top

## Footprints (in the part's own frame and the unit in brackets; to place one, negate y for a bottom-side part, rotate by r counter-clockwise, add the part's x,y. Pads: shape width x height; smd on the part's side, far side on the other; paste and mask are expansions set on the pad)
1N4007 [mm]
  rect 1.8x2 smd mask+0.05: 1(-2.13,0) 2(2.13,0)
  silkscreen extent -2,-1.5 2,1.5
7B08070001 [mm]
  rect 2x1.2 smd mask+0.05: 1(-1.85,-1.1) 2(1.85,-1.1) 3(1.85,1.1) 4(-1.85,1.1)
  silkscreen extent -2.5,-1.6 2.5,1.6
7V12000001 [mm]
  rect 1.4x1.2 smd mask+0.05: 1(-1.1,-0.85) 2(1.1,-0.85) 3(1.1,0.85) 4(-1.1,0.85)
  silkscreen extent -2.52,-1.47 1.6,1.25
AO3400 [mm] "AO3400"
  rect 0.6x1.05 smd mask+0.05: 1(-0.95,-1.35) 2(0.95,-1.35) 3(0,1.35)
  silkscreen extent -1.5,-0.75 1.5,0.75
B540C-13-F [mm]
  rect 2.5x3.3 smd mask+0.05: 1(-3.45,0) 2(3.45,0)
  silkscreen extent -4,-3 4,3
C1210 [mm] "Chip Capacitor, Body 3.2x2.5mm, IPC High Density"
  rect 1.1x2.6 smd: 1(-1.35,0) 2(1.35,0)
  silkscreen extent -0.4,-1.2 0.4,1.2, body extent -1.7,-1.35 1.7,1.35, height 1.3
CAP0402_HQ [mil]
  rect 20x22 smd paste-1 mask+2: 1(-15.51,0) 2(15.51,0)
  silkscreen extent -31,-16 31,16
CAP0805 [mil]
  rect 40x50 smd paste-1.24 mask+2.99: 1(-35,0) 2(35,0)
  silkscreen extent -61,-31 61,31
CAP0805-B [mil]
  rect 40x50 smd paste-1.24 mask+2.99: 1(-35,0) 2(35,0)
  silkscreen extent -61,-31 61,31
CH340G [mm]
  rect 0.6x1.75 smd mask+0.05: 1(-4.445,-2.825) 2(-3.175,-2.825) 3(-1.905,-2.825) 4(-0.635,-2.825) 5(0.635,-2.825) 6(1.905,-2.825) 7(3.175,-2.825) 8(4.445,-2.825) 9(4.445,2.825) 10(3.175,2.825) 11(1.905,2.825) 12(0.635,2.825) 13(-0.635,2.825) 14(-1.905,2.825) 15(-3.175,2.825) 16(-4.445,2.825)
  silkscreen extent -5.48,-3.1 5,3.1
CON1X2(2.54mm) [mm]
  rect 1.5x1.7 hole 1: 1(0,0)
  oval 1.5x1.7 hole 1: 2(2.54,0)
  silkscreen extent -1.27,-1.27 3.81,1.27
CON1X4(2.54mm) [mm]
  rect 1.5x1.7 hole 1: 1(0,0)
  oval 1.5x1.7 hole 1: 2(2.54,0) 3(5.08,0) 4(7.62,0)
  silkscreen extent -1.27,-1.27 8.89,1.27
CON2X4(2.54MM) [mm]
  oval 1.7x1.5 hole 0.8: 1(0,0) 2(2.54,0) 3(0,-2.54) 4(2.54,-2.54) 5(0,-5.08) 6(2.54,-5.08) 7(0,-7.62) 8(2.54,-7.62)
  silkscreen extent -1.4,-9.02 3.94,1.4
CSD18533Q5A [mil]
  rect 30x50 smd paste+1.5 mask+1.5: 1(-80,-130) 2(-30,-130) 3(20,-130) 4(70,-130)
  rect 204.72x196.85 smd paste+0.64 mask+0.64: 5(-4.21,31.85)
  silkscreen extent -150,-171 135,152
DTC043ZEBTL$2F$$2F$DTC143ZE$2F$$2F$LDTC143ZET1G [mm]
  rect 0.53x0.53 smd mask+0.05: 1(0.69,-0.5) 2(0.69,0.5) 3(-0.69,0)
  silkscreen extent -0.8,-0.8 0.8,0.8
ESD9X5.0ST5G [mm]
  rect 0.4x0.5 smd mask+0.05: 1(-0.45,0) 2(0.45,0)
  silkscreen extent -0.77,-0.43 0.77,0.43
ESD5601W-2$2F$TR [mm]
  rrect0% 0.8x0.8 smd mask+0.05: 1(-1.1,0) 2(1.1,0)
  silkscreen extent -1.65,-0.8 1.65,0.8
ESD5621W15-SOD323F [mm]
  rrect0% 0.8x0.8 smd mask+0.05: 1(-1.1,0) 2(1.1,0)
  silkscreen extent -1.65,-0.8 1.65,0.8
FIDUCIAL_WITHPASTE [mm]
  round 1 smd mask+0.5: 1(0,0)
  Top Layer keep-out region: 1,0 0.924,0.383 0.707,0.707 0.383,0.924 0,1 0,1 -0.383,0.924 -0.707,0.707 -0.924,0.383 -1,0 -1,0 -0.924,-0.383 -0.707,-0.707 -0.383,-0.924 0,-1 0,-1 0.383,-0.924 0.707,-0.707 0.924,-0.383 1,0
HX20018-2A [mm]
  oval 1x2 hole 0.8 mask+0.05: 1(-1,0) 2(1,0)
  round 1.2 hole 1.2 unplated mask+0.05: 3(2.5,1.7)
  silkscreen extent -3.68,-3.5 3,2.4
HX20018-3A [mm]
  oval 1x2 hole 0.8 mask+0.05: 1(-2,0) 2(0,0) 3(2,0)
  round 1.2 hole 1.2 unplated mask+0.05: 4(3.5,1.7)
  silkscreen extent -4.63,-3.5 4,2.4
HX20018-5A [mm]
  oval 1x2 hole 0.8 mask+0.05: 1(-4,0) 2(-2,0) 3(0,0) 4(2,0) 5(4,0)
  round 1.2 hole 1.2 unplated mask+0.05: 6(5.5,1.7)
  silkscreen extent -6.63,-3.5 6,2.4
HX20018-6A [mm]
  oval 1x2 hole 0.8 mask+0.05: 1(-5,0) 2(-3,0) 3(-1,0) 4(1,0) 5(3,0) 6(5,0)
  round 1.2 hole 1.2 unplated mask+0.05: 7(6.5,1.7)
  silkscreen extent -7.63,-3.5 7,2.4
HX39601-2A [mm]
  round 2.7 hole 1.85 mask+0.05: 1(-1.98,0) 2(1.98,0)
  silkscreen extent -4.63,-4.8 3.96,3.2
HX39601-3A [mm]
  round 2.7 hole 1.85 mask+0.05: 1(-3.96,0) 2(0,0) 3(3.96,0)
  silkscreen extent -6.61,-4.8 5.94,3.2
KEY_3x4x2 [mm]
  rect 1.5x1.5 smd mask+0.05: 1(0,2) 2(0,-2)
  silkscreen extent -1.5,-2 1.5,2
LED_1.6_0.8_0.4 [mm]
  rect 0.8x0.8 smd mask+0.05: 1(-0.75,0) 2(0.75,0)
  silkscreen extent -1.3,-0.55 1.3,0.55
LQFP144_STM32F103 [mm]
  round 1 smd: 0(-2.25,21.971) 0(19.75,0)
  oval 0.23x2 smd: 1(0,0)
  rect 0.23x2 smd: 2(0.5,0) 3(1,0) 4(1.5,0) 5(2,0) 6(2.5,0) 7(3,0) 8(3.5,0) 9(4,0) 10(4.5,0) 11(5,0) 12(5.5,0) 13(6,0) 14(6.5,0) 15(7,0) 16(7.5,0) 17(8,0) 18(8.5,0) 19(9,0) 20(9.5,0) 21(10,0) 22(10.5,0) 23(11,0) 24(11.5,0) 25(12,0) 26(12.5,0) 27(13,0) 28(13.5,0) 29(14,0) 30(14.5,0) 31(15,0) 32(15.5,0) 33(16,0) 34(16.5,0) 35(17,0) 36(17.5,0) 73(17.5,22) 74(17,22) 75(16.5,22) 76(16,22) 77(15.5,22) 78(15,22) 79(14.5,22) 80(14,22) 81(13.5,22) 82(13,22) 83(12.5,22) 84(12,22) 85(11.5,22) 86(11,22) 87(10.5,22) 88(10,22) 89(9.5,22) 90(9,22) 91(8.5,22) 92(8,22) 93(7.5,22) 94(7,22) 95(6.5,22) 96(6,22) 97(5.5,22) 98(5,22) 99(4.5,22) 100(4,22) 101(3.5,22) 102(3,22) 103(2.5,22) 104(2,22) 105(1.5,22) 106(1,22) 107(0.5,22) 108(0,22)
  rect 2x0.23 smd: 37(19.75,2.25) 38(19.75,2.75) 39(19.75,3.25) 40(19.75,3.75) 41(19.75,4.25) 42(19.75,4.75) 43(19.75,5.25) 44(19.75,5.75) 45(19.75,6.25) 46(19.75,6.75) 47(19.75,7.25) 48(19.75,7.75) 49(19.75,8.25) 50(19.75,8.75) 51(19.75,9.25) 52(19.75,9.75) 53(19.75,10.25) 54(19.75,10.75) 55(19.75,11.25) 56(19.75,11.75) 57(19.75,12.25) 58(19.75,12.75) 59(19.75,13.25) 60(19.75,13.75) 61(19.75,14.25) 62(19.75,14.75) 63(19.75,15.25) 64(19.75,15.75) 65(19.75,16.25) 66(19.75,16.75) 67(19.75,17.25) 68(19.75,17.75) 69(19.75,18.25) 70(19.75,18.75) 71(19.75,19.25) 72(19.75,19.75) 109(-2.25,19.75) 110(-2.25,19.25) 111(-2.25,18.75) 112(-2.25,18.25) 113(-2.25,17.75) 114(-2.25,17.25) 115(-2.25,16.75) 116(-2.25,16.25) 117(-2.25,15.75) 118(-2.25,15.25) 119(-2.25,14.75) 120(-2.25,14.25) 121(-2.25,13.75) 122(-2.25,13.25) 123(-2.25,12.75) 124(-2.25,12.25) 125(-2.25,11.75) 126(-2.25,11.25) 127(-2.25,10.75) 128(-2.25,10.25) 129(-2.25,9.75) 130(-2.25,9.25) 131(-2.25,8.75) 132(-2.25,8.25) 133(-2.25,7.75) 134(-2.25,7.25) 135(-2.25,6.75) 136(-2.25,6.25) 137(-2.25,5.75) 138(-2.25,5.25) 139(-2.25,4.75) 140(-2.25,4.25) 141(-2.25,3.75) 142(-2.25,3.25) 143(-2.25,2.75) 144(-2.25,2.25)
  silkscreen extent -0.84,-0.76 18.31,20.57
LTC2954CTS8 [mm]
  rect 0.45x1.05 smd mask+0.05: 1(0,0) 2(0.65,0) 3(1.3,0) 4(1.95,0) 5(1.95,2.7) 6(1.3,2.7) 7(0.65,2.7) 8(0,2.7)
  silkscreen extent -0.55,0.6 2.45,2.1
MAX3232CPWR [mm]
  rect 0.35x1.6 smd mask+0.05: 1(-2.275,-2.8) 2(-1.625,-2.8) 3(-0.975,-2.8) 4(-0.325,-2.8) 5(0.325,-2.8) 6(0.975,-2.8) 7(1.625,-2.8) 8(2.275,-2.8) 9(2.275,2.8) 10(1.625,2.8) 11(0.975,2.8) 12(0.325,2.8) 13(-0.325,2.8) 14(-0.975,2.8) 15(-1.625,2.8) 16(-2.275,2.8)
  silkscreen extent -3.55,-3.2 2.5,3.2
"MSOP-10 - 2" [mm]
  rect 0.3x1.6 smd mask+0.05: 1(-1,-2.1) 2(-0.5,-2.1) 3(0,-2.1) 4(0.5,-2.1) 5(1,-2.1) 6(1,2.1) 7(0.5,2.1) 8(0,2.1) 9(-0.5,2.1) 10(-1,2.1)
  silkscreen extent -1.55,-2.5 1.55,2.5
PHD2.0-20P [mm]
  round 1.3 hole 0.8 mask+0.05: 1(0,0) 2(2,0) 3(4,0) 4(6,0) 5(8,0) 6(10,0) 7(12,0) 8(14,0) 9(16,0) 10(18,0) 11(18,2) 12(16,2) 13(14,2) 14(12,2) 15(10,2) 16(8,2) 17(6,2) 18(4,2) 19(2,2) 20(0,2)
  silkscreen extent -2,-2.4 20,4
RES0402_HQ [mil]
  rect 20x22 smd paste-1 mask+2: 1(-15.51,0) 2(15.51,0)
  silkscreen extent -31,-16 31,16
RES0402_HQ-A [mil]
  rect 20x22 smd paste-1 mask+2: 1(-15.51,0) 2(15.51,0)
  silkscreen extent -31,-16 31,16
RES0402_HQ_NC [mil]
  rect 20x22 smd paste-1 mask+2: 1(-15.51,0) 2(15.51,0)
  silkscreen extent -31,-16 31,16
RES0603-A [mm]
  rect 0.58x0.89 smd mask+0.076: 1(-0.66,0) 2(0.66,0)
  silkscreen extent -1.1,-0.6 1.1,0.6
RES0805 [mil]
  rect 40x50 smd paste-1.24 mask+2.99: 1(-35,0) 2(35,0)
  silkscreen extent -61,-31 61,31
SMDJ [mm]
  rect 2.5x3.3 smd mask+0.05: 1(-3.45,0) 2(3.45,0)
  silkscreen extent -5,-3.3 5,3.3
SN74LVC4245APW [mm]
  rect 0.35x1.6 smd mask+0.05: 1(-3.575,-2.8) 2(-2.925,-2.8) 3(-2.275,-2.8) 4(-1.625,-2.8) 5(-0.975,-2.8) 6(-0.325,-2.8) 7(0.325,-2.8) 8(0.975,-2.8) 9(1.625,-2.8) 10(2.275,-2.8) 11(2.925,-2.8) 12(3.575,-2.8) 13(3.575,2.8) 14(2.925,2.8) 15(2.275,2.8) 16(1.625,2.8) 17(0.975,2.8) 18(0.325,2.8) 19(-0.325,2.8) 20(-0.975,2.8) 21(-1.625,2.8) 22(-2.275,2.8) 23(-2.925,2.8) 24(-3.575,2.8)
  silkscreen extent -3.9,-1.88 3.88,1.88
SOIC8_39MM [mm]
  oval 1.55x0.6 smd: 1(0,0) 2(0,-1.27) 3(0,-2.54) 4(0,-3.81) 5(5.4,-3.81) 6(5.4,-2.54) 7(5.4,-1.27) 8(5.4,0)
  silkscreen extent -0.63,-4.36 4.3,0.97
SOIC16_39MM [mm]
  oval 1.55x0.6 smd: 1(0,0) 2(0,-1.27) 3(0,-2.54) 4(0,-3.81) 5(0,-5.08) 6(0,-6.35) 7(0,-7.62) 8(0,-8.89) 9(5.4,-8.89) 10(5.4,-7.62) 11(5.4,-6.35) 12(5.4,-5.08) 13(5.4,-3.81) 14(5.4,-2.54) 15(5.4,-1.27) 16(5.4,0)
  silkscreen extent -0.62,-9.4 4.3,0.93
SRR1208 [mm]
  rect 4x7 smd mask+0.05: 1(-5,0) 2(5,0)
  silkscreen extent -8.7,-6.5 6.5,6.5
TO-252 [mm]
  rect 1.6x3.5 smd mask+0.05: 1(0,0) 2(4.572,0)
  rect 6.25x6.8 smd mask+0.05: 3(2.286,6.6)
  silkscreen extent -0.85,1.9 5.42,3.05
TOS23 [mm]
  rect 0.6x1 smd mask+0.075: 1(-0.95,-1.1) 2(0,-1.1) 3(0.95,-1.1) 4(0.95,1.1) 5(-0.95,1.1)
  silkscreen extent -1.83,-1.4 1.55,1.4
TPS7B6950 [mm]
  rect 0.6x1 smd mask+0.075: 1(-0.95,-1.1) 2(0,-1.1) 3(0.95,-1.1) 4(0.95,1.1) 5(-0.95,1.1)
  silkscreen extent -1.83,-1.4 1.55,1.4
TPS54560 [mm]
  rect 0.5x2.2 smd mask+0.05: 1(-1.905,-2.875) 2(-0.635,-2.875) 3(0.635,-2.875) 4(1.905,-2.875) 5(1.905,2.875) 6(0.635,2.875) 7(-0.635,2.875) 8(-1.905,2.875)
  rect 3.1x2.4 smd mask+0.05: 9(0,0)
  silkscreen extent -2.5,-4.49 2.5,3.1
UHD1H101MPD [mm]
  round 2 / inner round 1.4 / far side round 2 hole 1 mask+0.05: 1(-1.75,0)
  rect 2x2 / inner rect 1.4x1.4 / far side rect 2x2 hole 1 mask+0.05: 2(1.75,0)
  silkscreen extent -4.25,-4.26 4.25,4.26
UMT3F [mm]
  rect 0.9x0.5 smd mask+0.05: 1(0.8,-0.65) 2(0.8,0.65) 3(-0.8,0)
USB-9PIN [mm]
  oval 1.7x1.5 hole 1: 1(0,0) 2(2.54,0) 3(0,-2.54) 4(2.54,-2.54) 5(0,-5.08) 6(2.54,-5.08) 7(0,-7.62) 8(2.54,-7.62) 9(2.54,-10.16)
  silkscreen extent -1.4,-11.56 3.94,1.4
USR-LTE-7S4 [mm]
  rect 1.5x1.5 hole 0.85: 1(40.64,-2.565) 13(0,25.4)
  round 1.5 hole 0.85: 2(40.64,-0.025) 3(40.64,2.515) 4(40.64,5.055) 5(40.64,7.595) 6(40.64,10.135) 7(40.64,12.675) 8(40.64,15.215) 9(40.64,17.755) 10(40.64,20.295) 11(40.64,22.835) 12(40.64,25.375) 14(0,22.86) 15(0,20.32) 16(0,17.78) 17(0,15.24) 18(0,12.7) 19(0,10.16) 20(0,7.62) 21(0,5.08) 22(0,2.54) 23(0,0)
  silkscreen extent -1.27,-4.44 42.55,27.3
WSB5819W-2$2F$TR [mm]
  rect 0.8x0.9 smd mask+0.05: 1(-1.1,0) 2(1.1,0)
  silkscreen extent -1.25,-0.63 1.25,0.63
XGZP6847300KPA [mil]
  round 60 hole 40: 1(-196.85,100) 2(-196.85,0) 3(-196.85,-100) 4(196.85,-100) 5(196.85,0) 6(196.85,100)
  silkscreen extent -256,-256 256,256

## Part data
C1 C61 C72: "铝电解电容_100uF_80115_50V_20%"
C2 C31 C38 C54 C71: library part C0805_10UF_10V, "电容_10uF_0805_X5R_10V_K"
C3 C4 C5 C7 C9 C10 C11 C12 C13 C15 C16 C17 C18 C19 C20 C22 C23 C25 C26 C27 C28 C29 C30 C37 C50 C52 C55 C56 C60 C70 C83 C86 C87 C88 C89 C90 C91 C92 C93: "电容_100nF_0402_X7R_16V_K"
C6 C8 C57 C58: "电容_22pF_0402_C0G_50V_J"
C14 C21 C24 C32 C34 C35 C36 C39 C45 C51 C59 C62 C84 C85: "电容_10uF_0805_X5R_10V_K"
C33 C40 C41 C42 C43 C44 C46 C47 C48 C49 C53 C69 C79 C80 C81 C82: library part C0402_100NF_16V_K, "电容_100nF_0402_X7R_16V_K"
C63 C64 C67 C73 C74 C77: "电容_4.7uF_0805_X5R_50V_K"
C65: "电容47pF(0402-COG-50V-J)"
C66 C76: "电容_4.7uF_1210_X7R_50V_K"
C68: "电容47nF(0402-X7R-10V-K)"
C75: library part C0402_47PF_50V, "电容47pF(0402-COG-50V-J)"
C78: library part C0402_47NF_10V, "电容47nF(0402-X7R-10V-K)"
D1 D3: "防浪涌TVS VRWM=30V VBRmin=33.3 VC=48.4 IPP=62A"
D2 D21 D23: "肖特基二极管_5A_SMC"
D4 D5 D10 D16 D17 D19 D20 D35 D36 D37 D38 D39 D40 D41 D42 D43 D44 D45 D46 D47 D48 D49: "TVS_单路_单向_5.0V_65pF"
D6: "TVS_浪涌+静电二合一管_单向_15V_270pf"
D7 D8 D9 D22 D24 D50: "LED_(白色_0603_2.8V)_(HUE仅收5-5,5-6,5-7的标示，CAE仅收含P的标示)"
D11 D12 D13 D14: library part ESD9X5.0ST5G, "TVS_单路_单向_5.0V_65pF"
D15: "肖特基二极管_1A_SOD323"
D18 D34: "TVS_浪涌+静电二合一管_单向_7V_170pf"
D25 D26 D27 D28 D29 D30 D31 D32 D33: "1N4007 整流二极管 1A 1000V"
J1 J3 J4: "HX39601-2A 3.96mm"
J2 J5: library part "Header 4", "Header, 4-Pin"
J6: "HX20018-6A  2.0mm"
J8: "Header, 4-Pin, Dual row"
J9: library part PHD2.0-20P, "2.0mm间距接插件 双排插座"
J10: "HX20018-5A  2.0mm"
J11: "主板9pin 双USB接口  2.54mm"
J12 J13 J14 J15 J16 J17 J25: "HX20018-2A  2.0mm"
J18 J19 J20 J21 J22 J26: "HX20018-3A  2.0mm"
J23 J24: "HX39601-3A 3.96mm"
KEY1: "KEY_3x4x2mm"
L1: "功率电感_22uH_12.7*12.7*8.5mm_4A(Irat )_3.5A(Irms)_20%"
L2: "功率电感_15uH_12.7*12.7*8.5mm_4A(Irat )_3.5A(Irms)_20%"
Q1: library part CSD18532Q5B, "MOSFET, N-CH, 60V, 172A, SON 5x6mm"
Q3 Q5 Q7 Q11 Q13 Q16 Q17 Q22 Q23 Q24 Q25 Q28 Q29 Q30 Q34 Q36 Q50: "NPN三极管_100mA_EMT3F"
Q4: "PNP三极管_100mA_UMT3F"
Q10: library part DTC043ZEBTL, "NPN三极管_100mA_EMT3F"
R1 R2 R18 R49 R54 R90 R91 R121 R124: library part R0805_0R, "电阻0R(0805-0.125W-J)"
R3 R4 R5 R6 R19 R37 R67 R89 R92 R107 R117 R123: "电阻0R(0805-0.125W-J)"
R7 R9: "NC"
R8 R12 R14 R17 R56 R59 R71 R110 R112 R115 R116 R119 R122 R127 R128 R129: "电阻10K(0402-0.0625W-J)"
R10: library part R0402_NC, "NC"
R11: "电阻_1M(0402-0.0625W-J)"
R13 R29 R50 R51 R52 R53 R77 R135: "电阻0R(0603-0.1W-J)"
R15 R16 R45 R46 R47 R48 R63 R69 R70 R79 R81 R85 R93 R94 R95 R96 R99 R101 R103 R109 R111 R118 R120: "电阻100K(0402-0.0625W-J)"
R20 R21 R57 R58 R60 R61: "电阻0R(0402-0.0625W-J)"
R22 R23 R64 R65: library part R0402_0R_J, "电阻0R(0402-0.0625W-J)"
R24 R30 R31 R32 R33 R34 R35 R36 R38 R39 R40 R41 R42 R43 R44 R55 R130 R131: library part R0402_10K_J, "电阻10K(0402-0.0625W-J)"
R25 R26 R27 R108: library part R0402_1K_1/16W_J, "电阻_1K(0402-0.0625W-J)"
R28 R136 R137 R138 R139 R140: library part R0603_0R_J, "电阻0R(0603-0.1W-J)"
R62: "电阻220R(0402-0.0625W-J)"
R66: "电阻_27K_0402_1/16W_F"
R68: "电阻_5.76K_0402_1/16W_F"
R72: "电阻5.1K(0402-0.0625W-J)"
R73 R86: "电阻150K(0402-0.0625w-J)"
R74 R97 R98 R100 R102 R104 R105 R106 R113 R114 R125 R126: library part R0402_100K_J, "电阻100K(0402-0.0625W-J)"
R75: "电阻15K(0402-0.0625W-J)"
R76: "电阻_140K_0402_1/16W_F"
R78: library part R0402_5.76K_F, "电阻_5.76K_0402_1/16W_F"
R80: library part R0402_4.7K_J, "电阻4.7K(0402-0.0625W-J)"
R82: "电阻4.7K(0402-0.0625W-J)"
R83: "电阻_10K_0402_1/16W_F"
R84: library part R0402_15K_J, "电阻15K(0402-0.0625W-J)"
R87 R88: "电阻100R(0402-0.0625W-J)"
U2 U4: "MCP4728  4·DAC  I2C   MSOP10"
U3: "2K位串行CMOS E2PROM I2C接口"
U5: library part MAX3232CPWR, "UARTתRS232 оƬ"
U6: "Pushbutton On/Off"
U7 U9: library part RT9193-33, "单电池电压转换器  3.3V"
U8 U12: "XGZP6847_300KPG  气压范围-100kpa - 300kpa"
U10 U17: "1MHz, Low-Power Op Amp"
U11: library part SN74LVC4245AWP, "3.3V 至 5V 移位器"
U13: "接口芯片_USB转UART"
U14 U15: "Step Down DC-DC Converter"
U16: "8 线路到 3 线路优先编码器"
X1: "TXC 5032 7B系列晶体"
X2: "TXC 3225 7V系列晶体"

## Free pads (board coordinates)
  round 3.2 hole 3.2: 0(4,4) 0(4,76) 0(136,4) 0(136,76)

## Via types
v1: diameter 0.5, hole 0.3, Top Layer to Bottom Layer, tented both sides, 661 vias
v2: diameter 1.016, hole 0.61, Top Layer to Bottom Layer, tented both sides, 9 vias

## Nets (pads, with @x,y where several pads share a name; then routed paths per layer and width w, separated by ;. In a path a pad name is that pad's centre, name@x,y a point inside that pad or via, vN(x,y) a via of type N, cw(c..) or ccw(c..) an arc to the next point about the centre after c; other vN are vias at no path point)
3V3_EN: Q10.1 R35.1 R36.1 R130.2 U6.6 | length 16.6
  Top Layer w0.203: U6.6@99.919,70.071 99.919,68.292 100.33,67.882 103.441,67.882 103.942,68.382 105.085,68.382 105.855,69.151 105.855,71.12 Q10.1@105.037,71.937 104.89,72.085 R130.2@103.822,72.085 103.314,72.593 103.314,73.724 103.518,73.927 R36.1@104.076,73.927 104.381,74.231 R35.1@105.08,74.231
12V_EN: C79.2 R79.2 U1.64 U15.3 | length 77.7
  Top Layer w0.203: U1.64@60.296,49.948 64.489,49.948 67.31,52.768 69.151,52.768 69.723,53.34 69.723,54.356 70.025,54.658 74.626,54.658 75.658,55.689 77.534,55.689 80.709,58.864 105.981,58.864 109.601,55.245 109.601,42.608 108.966,41.974 105.664,41.974 105.334,42.304 C79.2@105.334,43.053 R79.2@105.334,44.259 104.521,44.259 104.267,44.514 U15.3@104.267,46.655
ACLED+: J9.14 R53.1 | length 18.3
  Top Layer w0.254: J9.14@53.244,75.057 54.578,76.391 57.594,76.391 58.229,75.755 58.229,74.358 58.547,74.041 61.341,74.041 62.166,74.867 R53.1@68.809,74.867
BOOT0: R9.2 R10.1 R59.1 U1.138 | length 36.9
  Top Layer w0.15: R59.1@24.956,52.146 25.921,52.146 26.607,52.832 29.718,52.832 31.595,54.709 39.144,54.709 39.814,54.038 39.814,39.56 39.702,39.448 U1.138@38.296,39.448
  Top Layer w0.203: R9.2@33.972,38.601 R10.1@35.115,38.601 35.871,38.601 36.717,39.448 U1.138@38.296,39.448
BOOT1: R7.2 R8.1 U1.48 | length 4.2
  Top Layer w0.15: U1.48@60.296,41.948 62.204,41.948 62.522,42.265 R7.2@63.309,42.265 R8.1@64.325,42.265
DAC1_SCL: R30.1 U1.4 U2.2 U3.6 | length 23.4
  Top Layer w0.203: U2.2@22.166,29.091 23.567,29.091 23.918,29.442 R30.1@24.575,29.442 26.013,29.442 26.162,29.591 30.734,29.591 31.051,29.273 U3.6@32.322,29.273 33.465,29.273 35.643,31.452 41.168,31.452 42.046,32.331 U1.4@42.046,34.198
DAC1_SDA: R31.1 U1.3 U2.3 U3.5 | length 22.7
  Top Layer w0.203: U2.3@22.166,29.591 23.567,29.591 24.507,30.531 R31.1@24.575,30.531 25.54,30.531 26.098,29.972 28.956,29.972 29.527,30.543 U3.5@32.322,30.543 33.909,30.543 35.171,31.806 40.713,31.806 41.546,32.639 U1.3@41.546,34.198
DAC2_SCL: R32.1 U1.2 U4.2 | length 23.1
  Top Layer w0.203: U4.2@22.865,36.14 23.821,36.14 24.108,36.427 R32.1@24.575,36.427 25.041,36.427 25.273,36.195 25.273,33.826 26.94,32.159 40.439,32.159 41.046,32.766 U1.2@41.046,34.198
DAC2_SDA: R33.1 U1.1 U4.3 | length 23.5
  Top Layer w0.203: U4.3@22.865,36.639 23.799,36.639 24.575,37.415 R33.1@24.575,37.579 25.082,37.579 25.626,37.035 25.626,33.972 27.087,32.512 40.102,32.512 40.546,32.956 U1.1@40.546,34.198
DAC_CH1: J20.1 U2.6 | length 25.2
  Top Layer w0.203: J20.1@3.556,18.129 5.62,18.129 6.286,18.796 v1(6.286,26.479) ; v1(6.286,28.448) 6.921,29.083 14.478,29.083 15.986,30.591 U2.6@17.966,30.591
  Bottom Layer w0.203: v1(6.286,26.479) v1(6.286,28.448)
DAC_CH2: J22.1 U2.7 | length 15.5
  Top Layer w0.203: J22.1@3.556,27.527 8.35,27.527 9.525,28.702 14.677,28.702 16.066,30.091 U2.7@17.966,30.091
DAC_CH3: J18.1 U2.8 | length 8
  Top Layer w0.203: J18.1@10.795,27.527 14.002,27.527 16.066,29.591 U2.8@17.966,29.591
DAC_CH4: J21.1 U4.6 | length 14.7
  Top Layer w0.203: J21.1@3.556,36.877 7.731,36.877 8.493,37.64 U4.6@17.966,37.64